# Allegro board CHOPPING WAVE OSC.brd
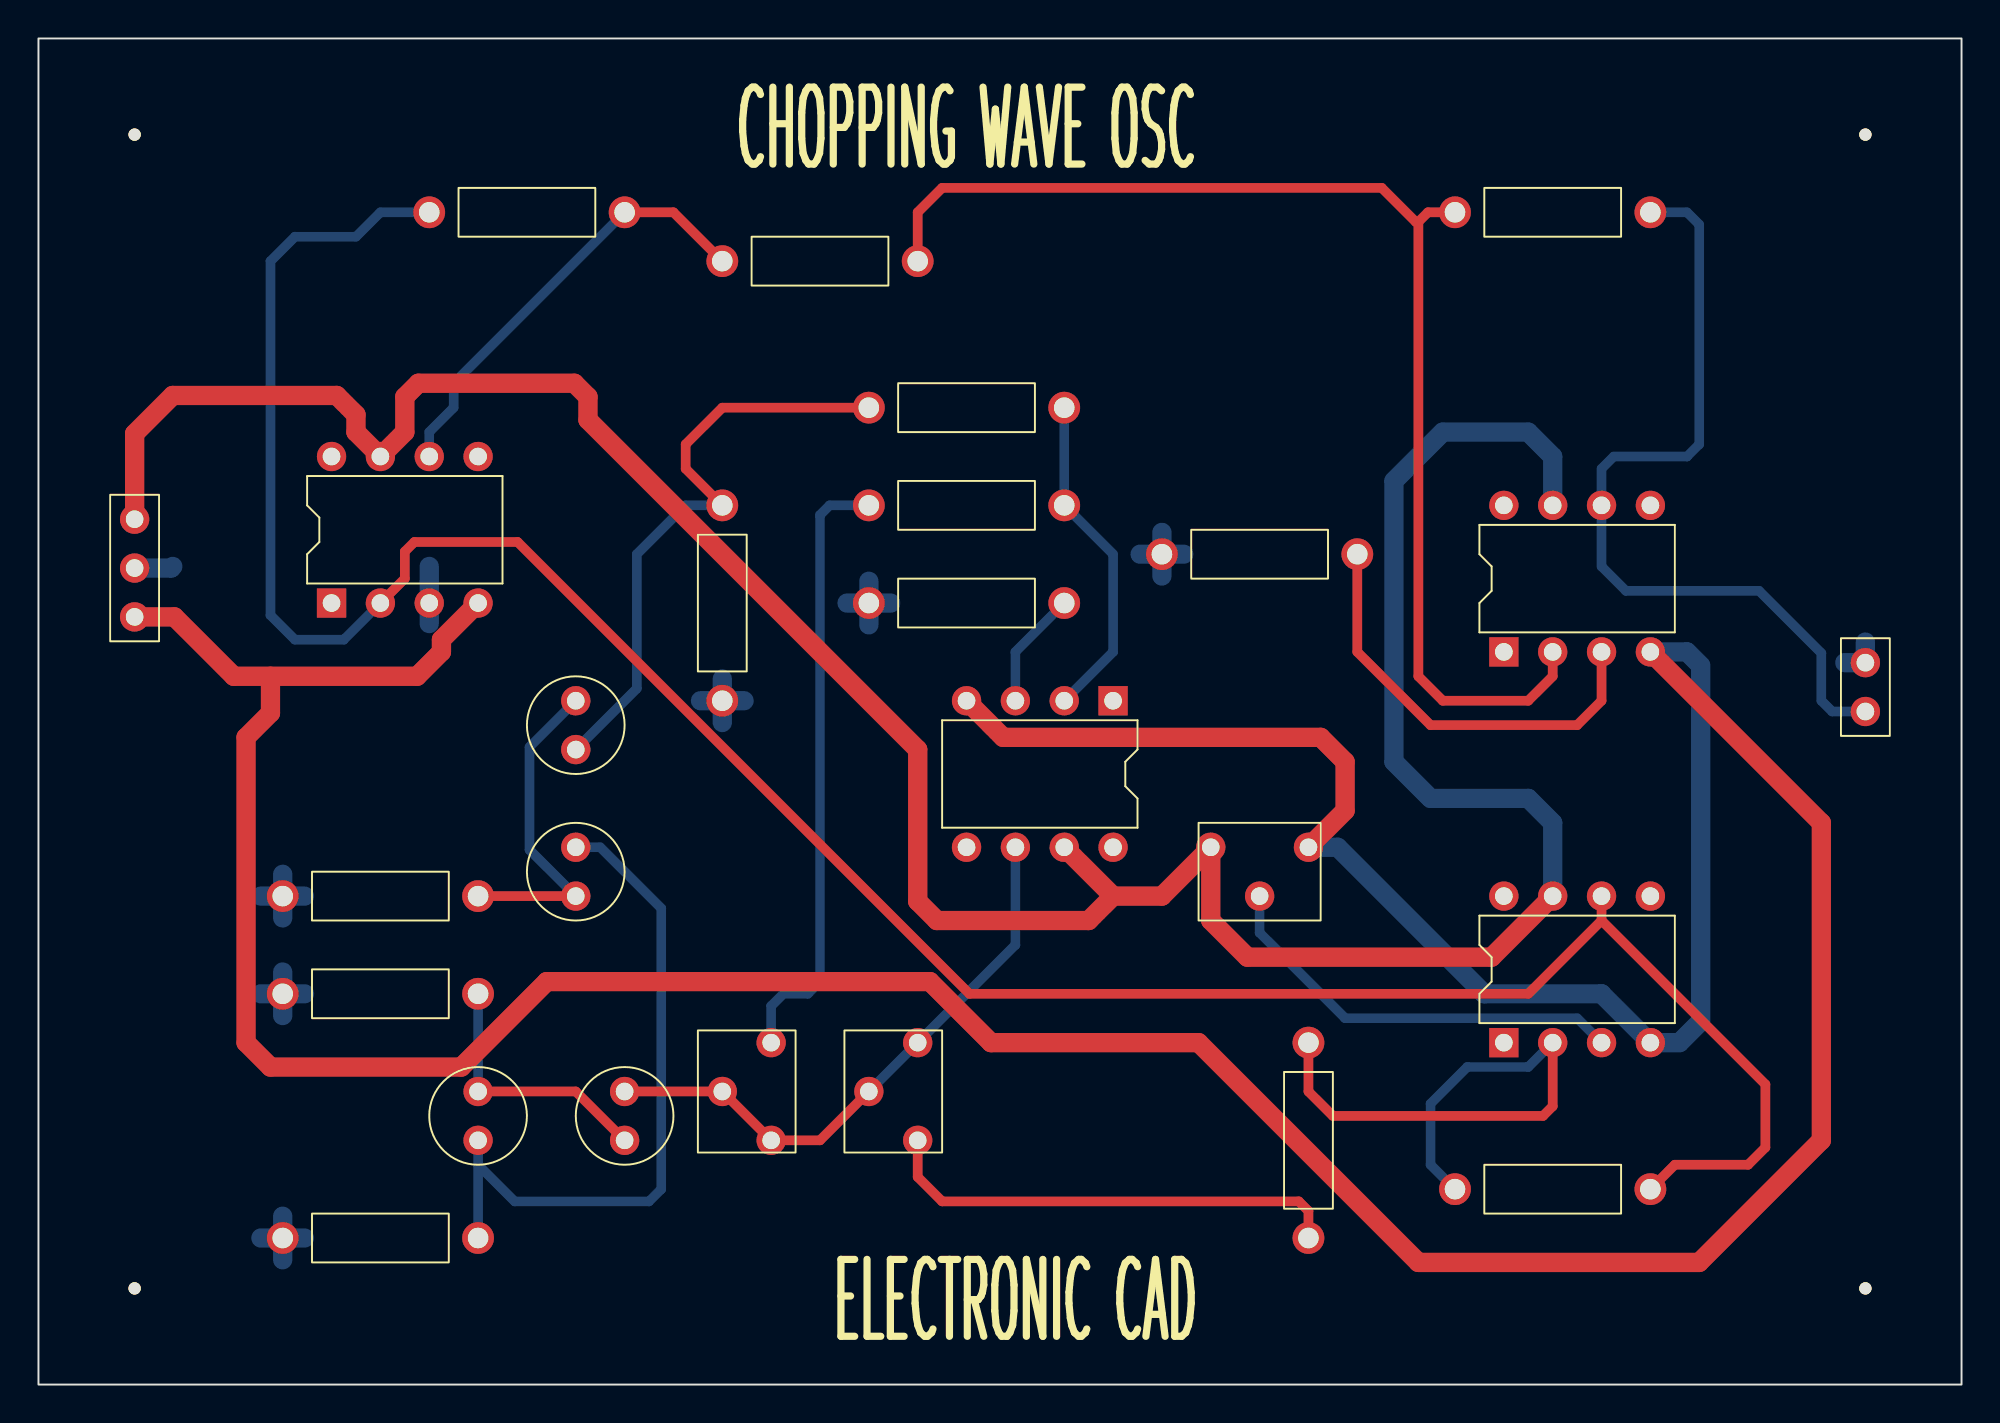
[diagram p0: board, top side]
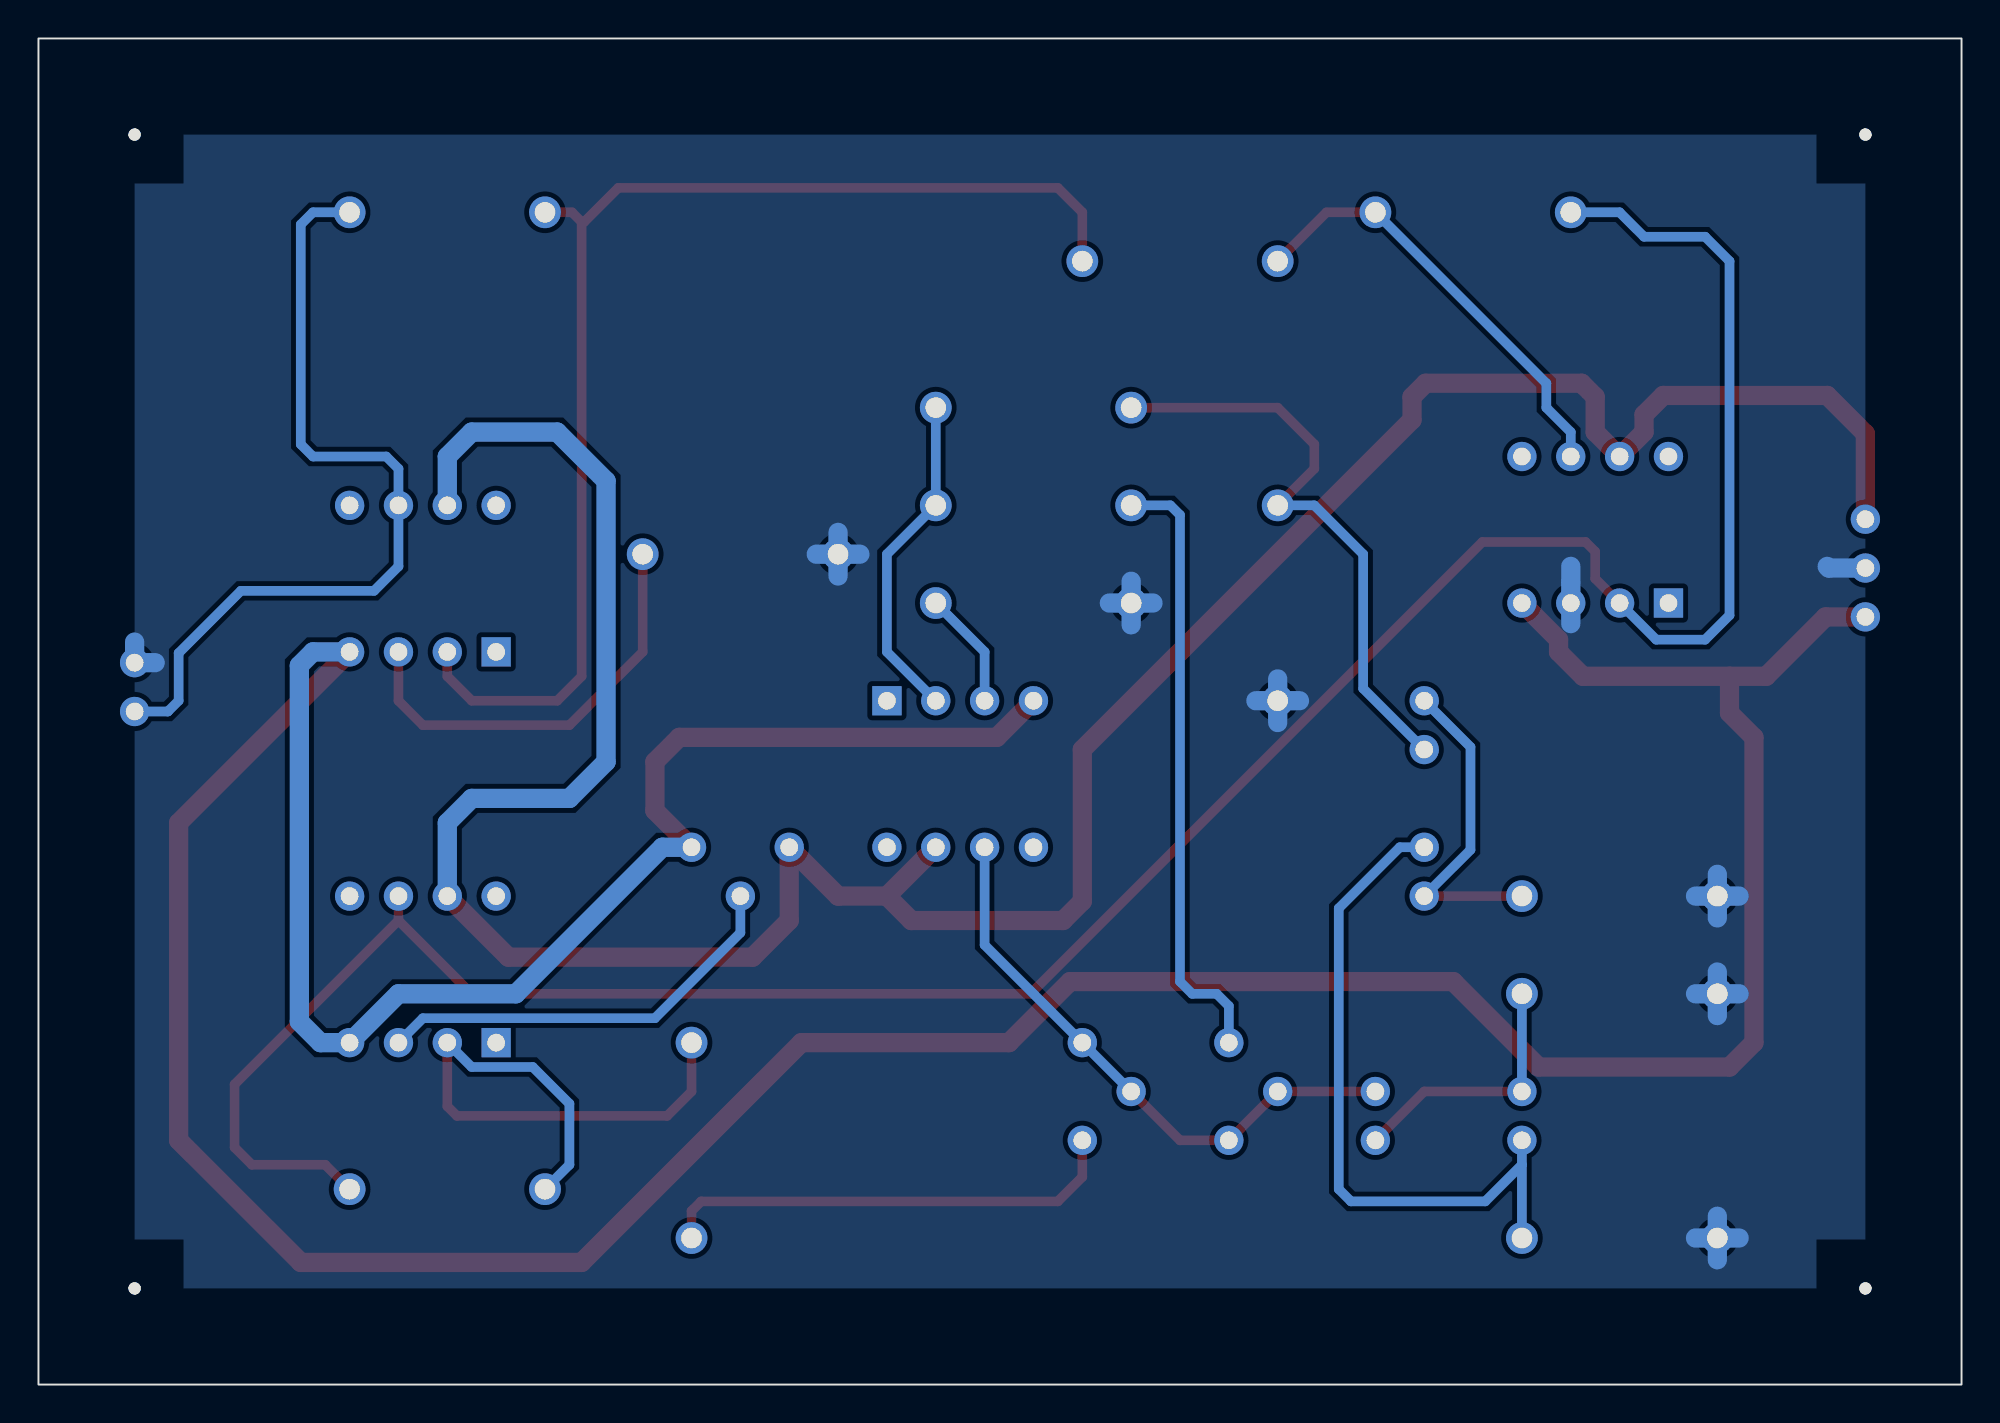
[diagram p1: board, bottom side, seen from below]

Outline 100 x 70 mm; copper layers: TOP, BOTTOM. Coordinates in mm from the lower left corner of the outline.
Outline path: rectangle 0,0 100,70

## Design rules (mm)
constraint set DEFAULT: min track width 0.5
nets with their own width: min track width 1; nets +12V -12V GND

## Placement (name value [footprint] x y rotation side)
C1  0.01uF  [CAP196]  30.48 15.24 180 top
C2  0.01uF  [CAP196]  22.86 15.24 180 top
C3  0.01uF  [CAP196]  27.94 27.94 180 top
C4  0.01uF  [CAP196]  27.94 35.56 180 top
J1  CON3  [JUMPER3]  5 45 270 top
J2  CON2  [JUMPER2]  95 35 90 top
NOREF  -  [unnamed]  5 5 0 top
NOREF#2  -  [unnamed]  95 5 0 top
NOREF#3  -  [#2]  0 70 0 top
NOREF#4  -  [unnamed]  95 65 0 top
NOREF#5  -  [#2]  0 0 90 top
NOREF#6  -  [unnamed]  5 65 0 top
R1  10K  [RES400]  73.66 10.16 270 top
R2  15K  [RES400]  53.34 45.72 90 top
R3  10K  [RES400]  43.18 50.8 270 top
R4  20K  [RES400]  66.04 7.62 0 top
R5  4.7K  [RES400]  22.86 20.32 90 top
R6  4.7K  [RES400]  22.86 7.62 90 top
R7  4.7K  [RES400]  22.86 25.4 90 top
R8  4.7K  [RES400]  35.56 45.72 180 top
R9  1K  [RES400]  53.34 40.64 90 top
R10  8.2K  [RES400]  20.32 60.96 270 top
R11  10K  [RES400]  73.66 60.96 270 top
R12  2.2K  [RES400]  35.56 58.42 270 top
R13  5.1K  [RES400]  58.42 43.18 270 top
U1  LF356  [DIP8_3]  55.88 35.56 270 top
U2  LF356  [DIP8_3]  76.2 17.78 90 top
U3  LF356  [DIP8_3]  15.24 40.64 90 top
U4  LF356  [DIP8_3]  76.2 38.1 90 top
VR1  470K  [RESADJ]  38.1 17.78 0 top
VR2  100K  [RESADJ]  45.72 17.78 0 top
VR3  10K  [RESADJ]  60.96 27.94 90 top

## Library data of the parts
C1-C4 = CAP NP: Tolerance: ***; User Part Number: ***
J1 = CON3: User Part Number: ***
J2 = CON2: User Part Number: ***
R1-R13 = R: Tolerance: ***; User Part Number: ***
U1-U4 = LF356/DIP8_0: Tolerance: ***; User Part Number: ***
VR1-VR3 = POT: Tolerance: ***; User Part Number: ***

## Footprints (pads in the part's own frame, mm; a bottom-side part is the same pattern mirrored in y, then rotated)
CAP196
  round 1.524 hole 0.914: 1(0,0) 2(0,2.54)
DIP8_3
  rect 1.524x1.524 hole 0.914: 1(0,0)
  round 1.524 hole 0.914: 2(0,-2.54) 3(0,-5.08) 4(0,-7.62) 5(7.62,-7.62) 6(7.62,-5.08) 7(7.62,-2.54) 8(7.62,0)
JUMPER2
  round 1.524 hole 0.914: 1(0,0) 2(2.54,0)
JUMPER3
  round 1.524 hole 0.914: 1(0,0) 2(2.54,0) 3(5.08,0)
RES400
  round 1.651 hole 1.067: 1(0,0) 2(0,10.16)
RESADJ
  round 1.524 hole 0.914: 1(0,0) 2(-2.54,-2.54) 3(0,-5.08)
unnamed
  round 0.635 hole 3.175 unplated: (0,0)

## Nets
+12V: J1.1 U1.7 U2.7 U3.7 U4.7 VR3.1
-12V: J1.3 U1.4(V-) U2.4(V-) U3.4(V-) U4.4(V-) VR3.3
GND: J1.2 J2.2 R5.2 R6.2 R7.2 R8.2 R9.2 R13.1 U3.3
OUT: J2.1 R11.2 U4.6
SIG: R1.2 R10.1 U2.6 U3.2
N00632: R2.1 R3.2 U1.2
N00636: R9.1 U1.3
N00658: R2.2 VR1.1
N00662: C4.2 R3.1 R8.1
N00676: C3.2 C4.1 R7.1
N00690: C2.2 C3.1 R6.1
N00704: C1.2 C2.1 R5.1
N00798: C1.1 U1.6 VR1.2(WIPER) VR1.3 VR2.1 VR2.2(WIPER)
N00911: R4.1 VR2.3
N01100: R1.1 R4.2 U2.2
N01164: U2.3 VR3.2(WIPER)
N02730: R10.2 R12.1 U3.6
N02766: R11.1 R12.2 U4.2
N02800: R13.2 U4.3

Pads without a net: U1 1 5 8; U2 1 5 8; U3 1 5 8; U4 1 5 8

## Routing (per net, layer and track width the routed paths; a pad name or vN(x,y) marks a point on that pad's centre or on a via; arc(x,y) is an arc through that point)
+12V: length 151.8
  TOP w1: 55.88,25.4 U1.7 ; 55.88,25.4 58.42,25.4 VR3.1 60.96,24.13 62.87,22.23 75.56,22.23 U2.7 ; 55.88,25.4 54.61,24.13 46.72,24.13 45.72,25.13 45.72,33.02 28.57,50.16 28.57,51.36 27.87,52.07 19.76,52.07 19.05,51.36 19.05,49.53 U3.7 16.51,49.53 16.51,50.44 15.51,51.44 6.99,51.44 5,49.45 J1.1
  BOTTOM w1: U4.7 78.74,48.26 77.47,49.53 73.03,49.53 70.48,46.99 70.48,32.38 72.39,30.48 77.47,30.48 78.74,29.21 U2.7
-12V: length 235.4
  TOP w1: J1.3 7.07,39.92 10.16,36.83 12.06,36.83 ; VR3.3 67.94,29.84 67.94,32.38 66.67,33.66 50.16,33.66 U1.4 ; 12.06,36.83 12.06,34.92 10.79,33.66 10.79,17.78 12.06,16.51 21.98,16.51 26.43,20.95 46.35,20.95 49.53,17.78 60.33,17.78 71.75,6.35 86.36,6.35 92.71,12.7 92.71,29.21 U4.4 ; 12.06,36.83 19.68,36.83 20.95,38.1 20.95,38.73 U3.4
  BOTTOM w1: VR3.3 67.56,27.94 75.18,20.32 81.28,20.32 U2.4 85.34,17.78 86.43,18.88 86.43,37.39 85.72,38.1 U4.4
GND: length 34.3
  BOTTOM w1: R13.1 59.55,43.18 ; R13.1 57.29,43.18 ; R13.1 58.42,42.05 ; R13.1 58.42,44.31 ; R7.2 12.7,26.53 ; R7.2 11.57,25.4 ; R7.2 13.83,25.4 ; R7.2 12.7,24.27 ; R5.2 13.83,20.32 ; R5.2 11.57,20.32 ; R5.2 12.7,19.19 ; R5.2 12.7,21.45 ; 6.99,42.55 6.9,42.46 J1.2 ; R8.2 36.69,35.56 ; R8.2 35.56,34.43 ; R8.2 34.43,35.56 ; R8.2 35.56,36.69 ; 42.05,40.64 R9.2 ; R9.2 43.18,39.51 ; R9.2 43.18,41.77 ; R9.2 44.31,40.64 ; 20.32,39.57 U3.3 20.32,42.55 ; 93.93,37.54 J2.2 95,38.61 ; R6.2 12.7,8.75 ; R6.2 13.83,7.62 ; R6.2 11.57,7.62 ; R6.2 12.7,6.49
OUT: length 43.2
  BOTTOM w0.5: R11.2 85.72,60.96 86.36,60.33 86.36,48.9 85.72,48.26 81.92,48.26 81.28,47.62 U4.6 81.28,42.55 82.55,41.27 89.47,41.27 92.71,38.04 92.71,35.56 93.27,35 J2.1
SIG: length 135.2
  TOP w0.5: 81.28,24.13 89.8,15.61 89.8,12.33 88.9,11.43 85.09,11.43 R1.2 ; 81.28,24.13 U2.6 ; 81.28,24.13 77.47,20.32 48.41,20.32 24.91,43.81 19.55,43.81 19.05,43.31 19.05,41.91 U3.2
  BOTTOM w0.5: R10.1 17.78,60.96 16.51,59.69 13.34,59.69 12.06,58.42 12.06,40.01 13.34,38.73 15.88,38.73 U3.2
N00632: length 17.3
  BOTTOM w0.5: R3.2 R2.1 55.88,43.18 55.88,38.1 U1.2
N00636: length 6.1
  BOTTOM w0.5: U1.3 50.8,38.1 R9.1
N00658: length 32
  BOTTOM w0.5: VR1.1 38.1,19.68 38.73,20.32 40.01,20.32 40.64,20.95 40.64,45.22 41.14,45.72 R2.2
N00662: length 31.3
  TOP w0.5: R3.1 35.56,50.8 33.66,48.9 33.66,47.62 R8.1
  BOTTOM w0.5: R8.1 33.66,45.72 31.11,43.18 31.11,36.2 C4.2
N00676: length 17.2
  TOP w0.5: R7.1 C3.2
  BOTTOM w0.5: C4.1 25.54,33.16 25.54,27.8 C3.2
N00690: length 36
  BOTTOM w0.5: 22.86,11.43 R6.1 ; 22.86,11.43 24.77,9.53 31.75,9.53 32.38,10.16 32.38,24.77 29.21,27.94 C3.1 ; 22.86,11.43 C2.2
N00704: length 13.8
  TOP w0.5: C2.1 27.94,15.24 C1.2
  BOTTOM w0.5: R5.1 C2.1
N00798: length 30.7
  TOP w0.5: VR2.2 40.64,12.7 VR1.3 VR1.2 C1.1
  BOTTOM w0.5: VR2.2 VR2.1 50.8,22.86 U1.6
N00911: length 24.4
  TOP w0.5: R4.1 66.04,9.03 65.54,9.53 46.99,9.53 45.72,10.79 VR2.3
N01100: length 31.9
  TOP w0.5: U2.2 78.74,14.47 78.24,13.97 67.31,13.97 66.04,15.24 R4.2
  BOTTOM w0.5: R1.1 72.39,11.43 72.39,14.61 74.3,16.51 77.47,16.51 U2.2
N01164: length 22.1
  BOTTOM w0.5: U2.3 80.01,19.05 67.94,19.05 63.5,23.5 VR3.2
N02730: length 23
  TOP w0.5: R10.2 33.02,60.96 R12.1
  BOTTOM w0.5: R10.2 21.59,52.07 21.59,50.8 20.32,49.53 U3.6
N02766: length 64.9
  TOP w0.5: U4.2 78.74,36.83 77.47,35.56 73.03,35.56 71.75,36.83 71.75,60.46 ; R12.2 45.72,60.96 46.99,62.23 69.85,62.23 71.62,60.46 71.75,60.46 ; R11.1 72.25,60.96 71.75,60.46
N02800: length 22.4
  TOP w0.5: R13.2 68.58,38.1 72.39,34.29 80.01,34.29 81.28,35.56 U4.3

## Copper pours and planes (outline as drawn; the poured copper is in the pictures)
GND on BOTTOM: 95,5 95,65 5,65 5,5 ; 2 cut-outs

## Text on the board
Ref Des/Silkscreen Top: CHOPPING WAVE OSC | ELECTRONIC CAD
DIMENSION: FIGURE | FINISHED_SIZE | 0.914 | 1.067 | 3.175 | DRILL CHART: TOP to BOTTOM | ALL UNITS ARE IN MILLIMETERS | PLATED | NON-PLATED | QTY | 54 | 26 | 4
